# Altium PCB Sheet1.PcbDoc
Units mil, origin at the board's own origin, x right, y up, seen from the top; angles counter-clockwise.
Board outline 3622.05 x 2440.96 mil, 2 copper layers (Top Layer, Bottom Layer); 48 components, 73 nets, 261 pads, 32 vias.
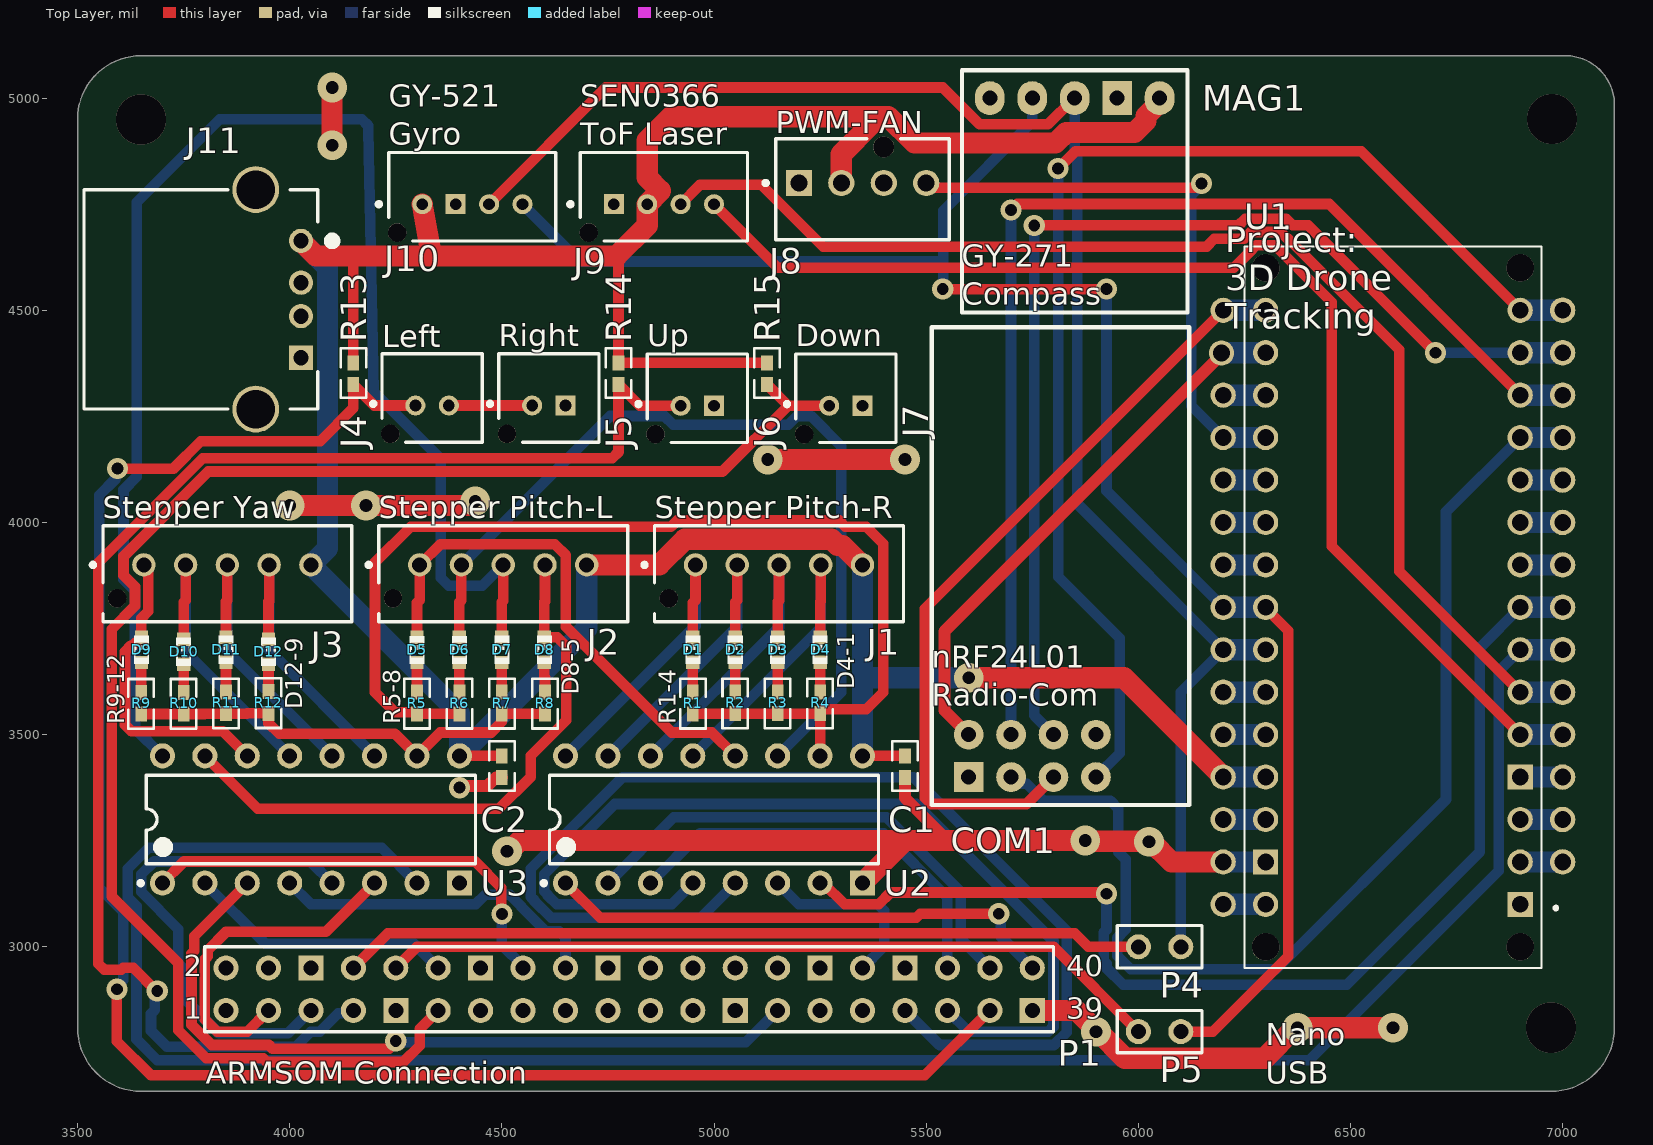
[diagram p0: Top Layer view]
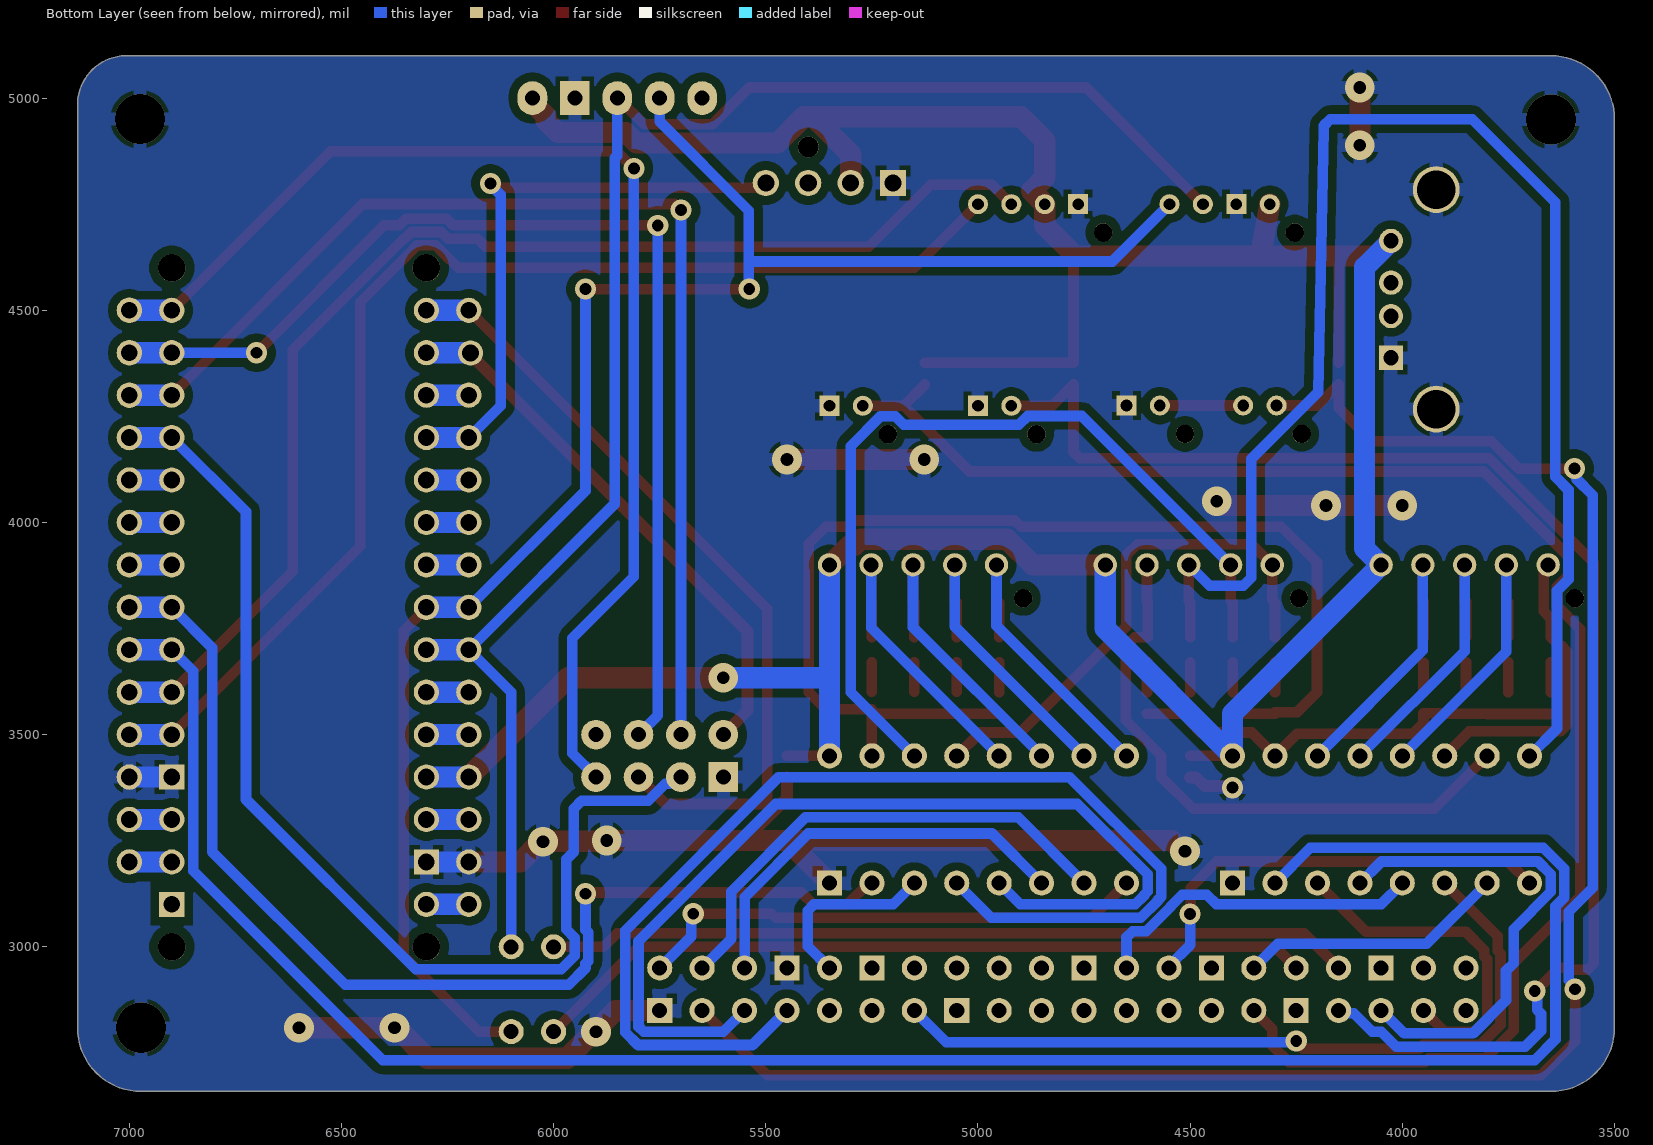
[diagram p1: Bottom Layer view, seen from below]
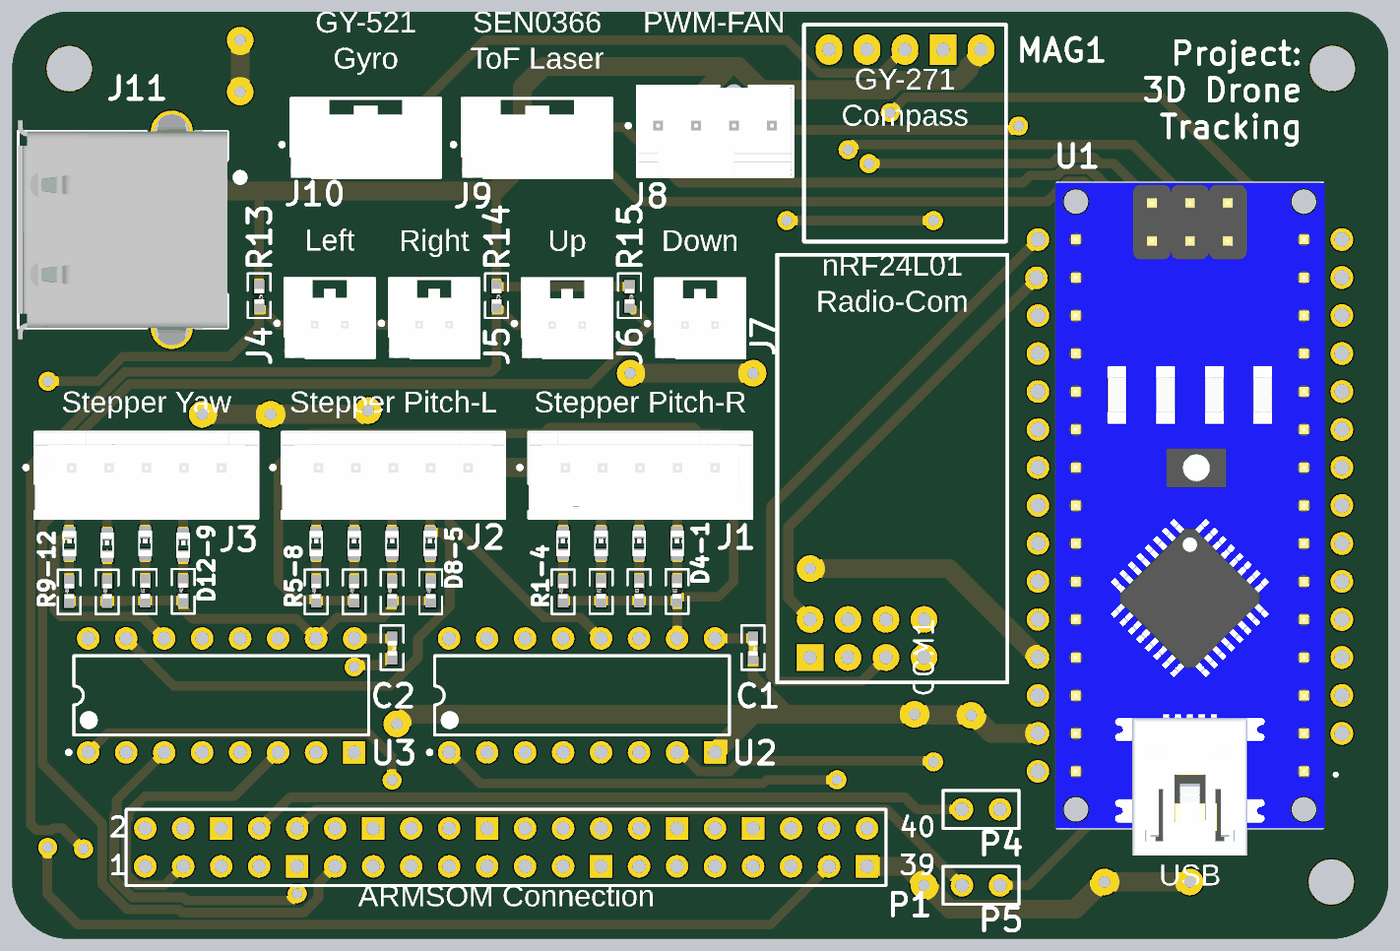
[diagram p2: 3D render of the assembled board from above, using the file's embedded part models]

## Layer stack, top to bottom
Top Solder: solder mask 0.4, Solder Resist, Dk 3.5
Top Layer: signal copper 1.4
Dielectric1: dielectric 12.6, FR-4, Dk 4.8
Bottom Layer: signal copper 1.4
Bottom Solder: solder mask 0.4, Solder Resist, Dk 3.5

## Board outline
3500,2809.05 3500,4950.17 3500,4950 cw(c3650,4950) 3650,5100 7000,5100 cw(c7005.82,4983.77) 7122.05,4989.59 7122.05,2809.05 cw(c6972.05,2809.06) 6972.05,2659.06 3650,2659.06 cw(c3650,2809.05)

## Design rules (kind name [scope] priority, off if disabled: settings)
Clearance "Text (Polygon)" [inPolygon vs isText] p1: gap=0 ignorepadtopadclearanceinfootprint=FALSE
Clearance "Masseflaeche (Polygon)" [All vs inPolygon] p2: gap=20 ignorepadtopadclearanceinfootprint=FALSE except(0: Arc-Hole Track-Hole SMDPad-Hole THPad-Hole Via-Hole Fill-Hole Poly-Hole Region-Hole Text-Hole)
Clearance "Abstand (Clearance)" [All] p3: gap=10 ignorepadtopadclearanceinfootprint=FALSE except(0: Arc-Hole Track-Hole SMDPad-Hole THPad-Hole Via-Hole Fill-Hole Poly-Hole Region-Hole Text-Hole; 6: SMDPad-SMDPad; 6.5: Arc-Arc Arc-Track Track-Track; 8: Arc-THPad Arc-Via Track-THPad Track-Via)
DiffPairsRouting [All] p1: maxlimit=15 minlimit=12 mostfreqgap=12 toplayer_minwidth=15 toplayer_maxwidth=15 toplayer_prefwidth=15 bottomlayer_minwidth=15 bottomlayer_maxwidth=15 bottomlayer_prefwidth=15 maxuncoupledlength=500
FabricationTestPointUsage TestPointUsage [All] p1: valid=0 allowmultiple=FALSE
FabricationTestpoint Testpoint [All] p1: side=3 testpointundercomponent=TRUE minsize=40 maxsize=100 preferedsize=60 minholesize=0 maxholesize=40 preferedholesize=32 testpointgrid=1 allowsidetop=TRUE allowsidebottom=TRUE usegrid=TRUE gridtolerance=0.01
HoleSize [All] p1: absolutevalues=TRUE maxlimit=250 minlimit=6 maxpercent=80.000 minpercent=20.000
HoleToHoleClearance [All] p1: gap=10 allowstackedmicrovias=FALSE
PlaneConnect [All] p1: planeconnectstyle=Relief reliefexpansion=20 reliefentries=4 reliefconductorwidth=32 reliefairgap=10
PolygonConnect [All] p1: connectstyle=Relief reliefconductorwidth=32 reliefentries=4 polygonreliefangle="90 Angle" airgapwidth=10
RoomDefinition Sheet1 [InComponentClass('Sheet1')] p1: confinementstyle=ConfineIn formatcopy=TRUE lockcomponents=FALSE outline 3500,2659.06 7122.05,2659.05 7122.05,5100 3500,5100
RoutingLayers RoutingLayers_1 [InNet('GND')] p1: top layer_v5=FALSE bottom layer_v5=FALSE
RoutingLayers [All] p2: top layer_v5=TRUE bottom layer_v5=TRUE
RoutingVias [All] p1: holewidth=28 width=50 viastyle="Through Hole" minholewidth=28 minwidth=50 maxholewidth=28 maxwidth=50
SMDEntry [All] p1: side=TRUE corner=TRUE anyangle=FALSE
SilkToSilkClearance [All] p1 off: silktosilkclearance=10
SilkToSolderMaskClearance SilkscreenOverComponentPads [IsPad] p1 off: minsilkscreentomaskgap=10 clearancetoexposedcopper=TRUE
SolderMaskExpansion [All] p1: expansion=4 istentingtop=FALSE
UnRoutedNet [All] p1: checkbadconnections=TRUE
Width Width_1 [InNet('5V')] p1: maxlimit=50 minlimit=25 preferedwidth=50 minimp=50.000000 maximp=50.000000 favimp=50.000000
Width [All] p2: maxlimit=200 minlimit=11 preferedwidth=25 minimp=50.000000 maximp=50.000000 favimp=50.000000
20 further rules are at their usual default settings.

## Classes and differential pairs
component class Sheet1: C1 C2 COM1 D1 D2 D3 D4 D5 D6 D7 D8 D9 D10 D11 D12 J1 J2 J3 J4 J5 J6 J7 J8 J9 J10 J11 MAG1 P1 P4 P5 R1 R2 R5 R6 R7 R8 R9 R11 R14 R15 U1 U2 U3

## Components (designator, comment, footprint, x,y, rotation, side; value= is the part's Value field where it differs from the comment)
C1 "100nF" C_SMD_C0402 5450,3449.4 r270 top
C2 "100nF" C_SMD_C0402 4500,3449.4 r270 top
COM1 "2.4 GHz radio module" nRF24L01 5900,3400 r90 top
D1 "SMD LED RED" SMD_0603_CHIP-LED 4950,3700 r0 top
D2 "SMD LED RED" SMD_0603_CHIP-LED 5050,3700 r0 top
D3 "SMD LED RED" SMD_0603_CHIP-LED 5150,3700 r0 top
D4 "SMD LED RED" SMD_0603_CHIP-LED 5250,3700 r0 top
D5 "SMD LED GREEN" SMD_0603_CHIP-LED 4300,3699.55 r0 top
D6 "SMD LED GREEN" SMD_0603_CHIP-LED 4400,3699.54 r0 top
D7 "SMD LED GREEN" SMD_0603_CHIP-LED 4500,3699.54 r0 top
D8 "SMD LED GREEN" SMD_0603_CHIP-LED 4600.02,3700 r0 top
D9 "SMD LED BLUE" SMD_0603_CHIP-LED 3650.6,3699.55 r0 top
D10 "SMD LED BLUE" SMD_0603_CHIP-LED 3750,3695.54 r0 top
D11 "SMD LED BLUE" SMD_0603_CHIP-LED 3850,3700 r0 top
D12 "SMD LED BLUE" SMD_0603_CHIP-LED 3950,3695.54 r0 top
J1 "Motor" FP-B5B-XH-AM_LF_SN-MFG 5153.15,3879.33 r180 top
J2 "Motor" FP-B5B-XH-AM_LF_SN-MFG 4503.15,3879.33 r180 top
J3 "Motor" FP-B5B-XH-AM_LF_SN-MFG 3853.15,3879.33 r180 top
J4 "B02B-PASK-1(LF)(SN)" FP-B02B-PASK-1_LF_SN-MFG#1 4335.63,4293.32 r180 top
J5 "B02B-PASK-1(LF)(SN)" FP-B02B-PASK-1_LF_SN-MFG#2 4610.63,4293.32 r180 top
J6 "B02B-PASK-1(LF)(SN)" FP-B02B-PASK-1_LF_SN-MFG#2 4960.63,4292.72 r180 top
J7 "B02B-PASK-1(LF)(SN)" FP-B02B-PASK-1_LF_SN-MFG#2 5310.63,4292.72 r180 top
J8 "47053-1000" FP-470531000-MFG 5350,4785.04 r180 top
J9 "B04B-PASK-1(LF)(SN)" FP-B04B-PASK-1_LF_SN-MFG#1 4881.89,4767.72 r180 top
J10 "B04B-PASK-1(LF)(SN)" FP-B04B-PASK-1_LF_SN-MFG#2 4430.51,4767.72 r180 top
J11 "292303-1" TE-292303-1_V 3981.65,4525.75 r270 top
MAG1 "GY-271" GY271 5850,5000 r270 top
P1 "Header 20X2" HDR2X20 3850,2850 r0 top
P4 "Header 2" HDR1X2 6100,3000 r180 top
P5 "Header 2" HDR1X2 6100,2800 r180 top
R1 "150" R_SMD_R0402 4950,3549.41 r90 top
R2 "150" R_SMD_R0402 5050,3550 r90 top
R3 "150" R_SMD_R0402 5150,3550 r90 top
R4 "150" R_SMD_R0402 5250,3550 r90 top
R5 "150" R_SMD_R0402 4300,3549.41 r90 top
R6 "150" R_SMD_R0402 4400,3549.41 r90 top
R7 "150" R_SMD_R0402 4500,3549.41 r90 top
R8 "150" R_SMD_R0402 4601.57,3549.41 r90 top
R9 "91" R_SMD_R0402 3650,3549.06 r90 top
R10 "91" R_SMD_R0402 3750,3549.06 r90 top
R11 "91" R_SMD_R0402 3850,3550 r90 top
R12 "91" R_SMD_R0402 3950,3550.59 r90 top
R13 "10K" R_SMD_R0402 4150,4375.59 r270 top value=10k
R14 "10K" R_SMD_R0402 4775,4375.59 r270 top value=10k
R15 "10K" R_SMD_R0402 5125,4375.59 r270 top value=10k
U1 "A000005" MODULE_A000005 6600,3800 r180 top
U2 "ULN2003AN" STM-DIP-16L 5000,3300 r90 top
U3 "ULN2003AN" STM-DIP-16L 4050,3300 r90 top

## Footprints (in the part's own frame and the unit in brackets; to place one, negate y for a bottom-side part, rotate by r counter-clockwise, add the part's x,y. Pads: shape width x height; smd on the part's side, far side on the other; paste and mask are expansions set on the pad)
C_SMD_C0402 [mm] "SMD, 0402"
  rect 0.9x0.7 smd: 1(-0.015,0) 2(1.285,0)
  silkscreen extent -0.89,-0.76 2.08,0.76, body extent 0.14,-0.3 1.14,0.3, height 0.2
FP-470531000-MFG [mm]
  rect 1.57x1.57 hole 1.02 paste-1000 mask+0: 1(3.81,-0.38)
  round 1.57 hole 1.02 paste-1000 mask+0: 2(1.27,-0.38) 3(-1.27,-0.38) 4(-3.81,-0.38)
  round 1.25 hole 1.25 unplated paste-1000 mask+0: ""(-1.27,-2.54)
  silkscreen extent -5.2,-3.02 5.92,3.02, body extent -5.3,-3.26 5.3,3.12, height 0.25
FP-B02B-PASK-1_LF_SN-MFG#1 [mm]
  round 1.2 hole 0.7 paste-1000 mask+0: 1(1,0.45) 2(-1,0.45)
  round 1.1 hole 1.1 unplated paste-1000 mask+0: ""(2.5,2.15)
  silkscreen extent -3,-2.65 3.65,2.65, body extent -3.1,-2.75 3.15,2.8, height 0.25
FP-B02B-PASK-1_LF_SN-MFG#2 [mm]
  round 1.2 hole 0.7 paste-1000 mask+0: 1(1,0.45)
  rect 1.2x1.2 hole 0.7 paste-1000 mask+0: 2(-1,0.45)
  round 1.1 hole 1.1 unplated paste-1000 mask+0: ""(2.5,2.15)
  silkscreen extent -3,-2.65 3.65,2.65, body extent -3.1,-2.75 3.15,2.8, height 0.25
FP-B04B-PASK-1_LF_SN-MFG#1 [mm]
  rect 1.2x1.2 hole 0.7 paste-1000 mask+0: 1(3,0.45)
  round 1.2 hole 0.7 paste-1000 mask+0: 2(1,0.45) 3(-1,0.45) 4(-3,0.45)
  round 1.1 hole 1.1 unplated paste-1000 mask+0: ""(4.5,2.15)
  silkscreen extent -5,-2.65 5.72,2.65, body extent -5.1,-2.75 5.15,2.8, height 0.25
FP-B04B-PASK-1_LF_SN-MFG#2 [mm]
  round 1.2 hole 0.7 paste-1000 mask+0: 1(3,0.45) 3(-1,0.45) 4(-3,0.45)
  rect 1.2x1.2 hole 0.7 paste-1000 mask+0: 2(1,0.45)
  round 1.1 hole 1.1 unplated paste-1000 mask+0: ""(4.5,2.15)
  silkscreen extent -5,-2.65 5.72,2.65, body extent -5.1,-2.75 5.15,2.8, height 0.25
FP-B5B-XH-AM_LF_SN-MFG [mm]
  round 1.4 hole 0.9 paste-1000 mask+0: 1(5,-0.525) 2(2.5,-0.525) 3(0,-0.525) 4(-2.5,-0.525) 5(-5,-0.525)
  round 1.1 hole 1.1 unplated paste-1000 mask+0: ""(6.6,1.475)
  silkscreen extent -7.45,-2.88 8.17,2.87, body extent -7.55,-2.98 7.55,2.98, height 0.25
GY271 [mil]
  oval 80x70 hole 35.43: DRDY(0,-200) SCL(0,0) SDA(0,-100) VCC(0,200)
  rect 80x70 hole 35.43: GND(0,100)
  silkscreen extent -66,-266 505,266
HDR1X2 [mm] "Connector; Header; 2 Position"
  round 1.5 hole 0.9: 1(0,0) 2(2.54,0)
  silkscreen extent -1.27,-1.27 3.81,1.27
HDR2X20 [mm] "Connector; Header; 20x2 Position"
  round 1.5 hole 0.9: 1(0,0) 2(0,2.54) 3(2.54,0) 4(2.54,2.54) 5(5.08,0) 7(7.62,0) 8(7.62,2.54) 10(10.16,2.54) 11(12.7,0) 12(12.7,2.54) 13(15.24,0) 15(17.78,0) 16(17.78,2.54) 17(20.32,0) 18(20.32,2.54) 19(22.86,0) 21(25.4,0) 22(25.4,2.54) 23(27.94,0) 24(27.94,2.54) 26(30.48,2.54) 27(33.02,0) 28(33.02,2.54) 29(35.56,0) 31(38.1,0) 32(38.1,2.54) 33(40.64,0) 35(43.18,0) 36(43.18,2.54) 37(45.72,0) 38(45.72,2.54) 40(48.26,2.54)
  rect 1.5x1.5 hole 0.9: 6(5.08,2.54) 9(10.16,0) 14(15.24,2.54) 20(22.86,2.54) 25(30.48,0) 30(35.56,2.54) 34(40.64,2.54) 39(48.26,0)
  silkscreen extent -1.27,-1.27 49.53,3.81
MODULE_A000005 [mm]
  rect 1.508x1.508 / inner round 1.508 / far side rect 1.508x1.508 hole 1: 1(-7.62,17.78)
  round 1.508 hole 1: 2(-7.62,15.24) 3(-7.62,12.7) 5(-7.62,7.62) 6(-7.62,5.08) 7(-7.62,2.54) 8(-7.62,0) 9(-7.62,-2.54) 10(-7.62,-5.08) 11(-7.62,-7.62) 12(-7.62,-10.16) 13(-7.62,-12.7) 14(-7.62,-15.24) 15(-7.62,-17.78) 16(7.62,-17.78) 17(7.62,-15.24) 18(7.62,-12.7) 19(7.62,-10.16) 20(7.62,-7.62) 21(7.62,-5.08) 22(7.62,-2.54) 23(7.62,0) 24(7.62,2.54) 25(7.62,5.08) 26(7.62,7.62) 27(7.62,10.16) 28(7.62,12.7) 30(7.62,17.78)
  rect 1.508x1.508 hole 1: 4(-7.62,10.16) 29(7.62,15.24)
  round 1.651 hole 1.651 unplated: ""(-7.62,20.32) ""(-7.62,-20.32) ""(7.62,20.32) ""(7.62,-20.32)
  silkscreen extent -9.85,-21.59 8.89,21.59, body extent -9,-21.6 9,23.4, height 12.6
nRF24L01 [mil]
  round 70 hole 35.43: CE(0,200) CSN(100,200) IRQ(100,0) MISO(0,0) MOSI(100,100) SCK(0,100) VCC(100,300)
  rect 70x70 hole 35.43: GND(0,300)
  silkscreen extent -66,-220 1060,387
R_SMD_R0402 [mm] "SMD, 0402"
  rect 0.9x0.7 smd: 1(-0.015,0) 2(1.285,0)
  silkscreen extent -0.89,-0.76 2.08,0.76, body extent 0.14,-0.3 1.14,0.3, height 0.2
SMD_0603_CHIP-LED [mm]
  rect 0.8x0.8 smd: A(0,-0.75) K(0,0.75)
  silkscreen extent -0.45,-0.85 0.45,0.85
STM-DIP-16L [mm] "DIP, 16-Leads, Body 19.7x7.1mm, Pitch 2.54mm"
  round 1.5 hole 0.9: 1(-3.81,8.89) 2(-3.81,6.35) 3(-3.81,3.81) 4(-3.81,1.27) 5(-3.81,-1.27) 6(-3.81,-3.81) 7(-3.81,-6.35) 9(3.81,-8.89) 10(3.81,-6.35) 11(3.81,-3.81) 12(3.81,-1.27) 13(3.81,1.27) 14(3.81,3.81) 15(3.81,6.35) 16(3.81,8.89)
  rect 1.5x1.5 hole 0.9: 8(-3.81,-8.89)
  silkscreen extent -3.93,-9.85 2.65,10.31, body extent -3.95,-9.85 3.95,9.85, height 5.33
TE-292303-1_V [mm] "THD, 4-Leads, Body 13.13x14mm, Pitch 2.5mm"
  round 1.45 hole 0.92: 1(-3.5,1.144) 2(-1,1.144) 3(1,1.144)
  rect 1.45x1.45 hole 0.92: 4(3.5,1.144)
  round 2.8 hole 2.3: 5(-6.57,-1.566) 6(6.57,-1.566)
  silkscreen extent -6.57,-11.85 6.56,3.25, body extent -8.12,-11.85 8.12,2.15, height 7.72

## Part data
C1 C2: library part C_SMD, "SMD Capacitor", Rated Voltage=25V, LatestRevisionDate=07-Sep-2019, Published=21-Feb-2011, Usage="only permitted for non-commercial purposes at HTL I Innsbruck"
COM1: library part nRF24L01, "Header, 4-Pin, Dual row", LatestRevisionDate=17-Jul-2002, LatestRevisionNote="Re-released for DXP Platform.", Publisher="Altium Limited"
D1 D2 D3 D4: library part SMD_LED_RED, "Red GaAs LED (Vf=2V, If=20mA)", LatestRevisionDate=21-Jun-2015, Published=29-Mar-2017, SimulationModellSource="Miscellaneous Devices", Usage="only permitted for non-commercial purposes at HTL I Innsbruck"
D5 D6 D7 D8: library part SMD_LED_GREEN, "Green GaAs LED (Vf=2V, If=20mA)", LatestRevisionDate=21-Jun-2015, Published=29-Mar-2017, SimulationModellSource="Miscellaneous Devices", Usage="only permitted for non-commercial purposes at HTL I Innsbruck"
D9 D10 D11 D12: library part SMD_LED_BLUE, "Blue SiC LED (Vf=3.2V, If=20mA)", LatestRevisionDate=21-Jun-2015, Published=29-Mar-2017, SimulationModellSource="Miscellaneous Devices", Usage="only permitted for non-commercial purposes at HTL I Innsbruck"
J1 J2 J3: library part CMP-17439-000304-1, "CONN HEADER VERT 5POS 2.5MM", Color=Green, Contact Resistance=20mR, Flammability Rating="UL94 V-0", Housing Color=White, Insulation Color=Natural, Max Current Rating=3A, Max Operating Temperature=85°C, Max Voltage Rating (AC)=250V, Min Operating Temperature=-25°C, Connector Type=Header, Contact Finish - Mating=TIN, Contact Material=Brass, Contact Plating=Copper, Contact Shape=Square, Contact Type="Male Pin", Depth=5.75mm, Fastening Type=Detent, Housing Material=Polyamide, Insulation Material=Nylon, Lead Free="Lead Free", Length=14.9mm, Mated Stacking Heights=9.8mm, Mount="Through Hole", Number of Positions=5, Number of Rows=1, Orientation=Straight, Packaging=Bulk, Pitch=2.5mm, Series=XH, Termination=Solder, Voltage Rating=250V
J4 J5 J6 J7: library part CMP-17439-000415-1, "CONN HEADER VERT 2POS 2MM", Color=Natural, Current Rating=3A, Flammability Rating="UL94 V-0", Housing Color=White, Insulation Resistance=1GR, Max Operating Temperature=85°C, Min Operating Temperature=-25°C, Voltage Rating=250V, Connector Type=Header, Contact Finish - Mating=TIN, Contact Material="Copper Alloy", Contact Mating Length=0.126inch, Contact Plating=Tin, Contact Shape=Square, Contact Type="Male Pin", Fastening Type=Ramp, Gender=Male, Insulation Color=Natural, Insulation Material=PBT, Lead Free="Lead Free", Mated Stacking Heights=14.9mm, Material=Polybutylene, Mount="Through Hole", Number of Contacts=2, Number of Positions=2, Number of Rows=1, Orientation=Straight, Packaging=Bulk, Pitch=2mm, Series=PA, Termination=Solder
J8: library part CMP-04776-000290-2, "CONN HEADER VERT 4POS 2.54MM", Ambient Temperature Range High=105°C, Current Rating=500mA, Housing Color=Beige, Manufacturer Lifecycle Status=ACTIVE, Max Operating Temperature=75°C, Min Operating Temperature=0°C, Voltage Rating=250V, Contact Material="Brass, Copper", Contact Plating=Tin, Country of Origin=HK, Depth=5.84mm, Gender=Male, Glow Wire Compliant=Non-compliant, Halogen Free="Low Halogen", Height=7.7mm, Housing Material=Nylon, Lead Pitch=2.54mm, Length=10.2mm, Lifecycle Status=Production, Mount="Through Hole", NexarPartId=854935, Number of Circuits=4, Number of Contacts=4, Number of Pins=4, Number of Positions=4, Number of Rows=1, Orientation=Vertical, Packaging=Bulk, Pitch=2.54mm, Plating=Copper, Radiation Hardening=No, REACH SVHC=Unknown, RoHS=Compliant, Schedule B="8536694040, 8536694040", Termination="Through Hole", Voltage Rating (DC)=250V
J9 J10: library part CMP-17439-000192-1, "CONN HEADER VERT 4POS 2MM", Color=Natural, Contact Resistance=20mR, Current Rating=3A, Flammability Rating="UL94 V-0", Housing Color=White, Max Operating Temperature=85°C, Max Voltage Rating (AC)=250V, Min Operating Temperature=-25°C, Connector Type=Header, Contact Finish - Mating=TIN, Contact Material="Copper Alloy", Contact Mating Length=0.126inch, Contact Plating=Copper, Contact Shape=Square, Contact Type="Male Pin", Depth=5.3mm, Fastening Type=Ramp, Gender=Male, Insulation Color=Natural, Insulation Material=PBT, Lead Free="Lead Free", Length=10mm, Mated Stacking Heights=14.9mm, Max Current Rating=3A, Mount="Through Hole", Number of Contacts=4, Number of Positions=4, Number of Rows=1, Orientation=Straight, Packaging=Bulk, Pitch=2mm, Series=PA, Termination=Solder, Voltage Rating=250V
J11: library part CMP-2000-05404-1, "1 Port Right Angle Through Hole Mount Female Type A USB Connector, 4 Position, -55 to 85 degC, RoHS, Tube", Manufacturer="TE Connectivity", Package Description="4-Pin Through Hole Device, Body 14 x 13.13 mm, Pitch 2.5 mm", Connector Mounting=PCB, Connector Type=USBA, Contact Material=Copper, Contact Plating=Gold, Contact Termination Type=Solder, Datasheet URL=http://www.farnell.com/cad/1653030.pdf, Datasheet Version=Feb-12, Gender=Receptacle, Manufacturer URL=http://www.te.com/, No. of Contacts=4, Package Reference=292303-1, SVHC=NoSVHC(16-Jun-2014)
MAG1: library part GY271, "I2C Compass Module Compass Magnet Sensor"
P1: "Header, 20-Pin, Dual row", LatestRevisionDate=17-Jul-2002, LatestRevisionNote="Re-released for DXP Platform.", Publisher="Altium Limited"
P4 P5: "Header, 2-Pin", LatestRevisionDate=17-Jul-2002, LatestRevisionNote="Re-released for DXP Platform.", Publisher="Altium Limited"
R1 R2 R3 R4 R5 R6 R7 R8 R9 R10 R11 R12 R13 R14 R15: library part R_SMD, "SMD Resistor", LatestRevisionDate=07-Sep-2019, Published=21-Feb-2011, Usage="only permitted for non-commercial purposes at HTL I Innsbruck"
U1: "Small, complete, and breadboard-friendly board based on the ATmega328 (Arduino Nano 3.x).", Package="Non-Standard Arduino", Availability="In Stock", Check_prices=https://www.snapeda.com/parts/A000005/Arduino/view-part/?ref=eda, MF=Arduino, MP=A000005, Price=None, Purchase-URL=https://pricing.snapeda.com/search/part/A000005/?ref=eda, SnapEDA_Link=https://www.snapeda.com/parts/A000005/Arduino/view-part/?ref=snap
U2 U3: library part CMP-2000-07351-1, "Seven Darlington Array, 50 V, 0.5 A, -40 to 85 degC, 16-Pin DIP, RoHS, Tube", Collector Emitter Voltage V(br)ceo=50V, DC Collector Current=500mA, DC Current Gain hFE=1000hFE, Manufacturer=STMicroelectronics, Operating Temperature Max=85°C, Output Current=0.5A, Package Description="16-Pin DIP, Body 19.7 x 7.1 mm, Pitch 2.54 mm", Package Reference=DIP-16L, PartNumber=ULN2003A, Power Dissipation Pd=-, Transistor Case Style=DIP, Automotive Qualification Standard=-, Datasheet URL=http://www2.st.com/content/ccc/resource/technical/document/datasheet/f3/6e/c8/64/4d/b3/4e/38/CD00001244.pdf/files/CD00001244.pdf/jcr:content/translations/en.CD00001244.pdf, Datasheet Version="Rev. 8, 06/2012", Manufacturer URL=http://www.st.com/, Mounting Technology=ThroughHole, MSL=MSL2-1year, No. of Pins=16Pins, Product Range=-, SVHC=NoSVHC(17-Dec-2015), Transistor Polarity=NPN, VOUT=50V

## Free pads (board coordinates)
  oval 59.37x60 hole 39.37: 32(7000,4500) 33(7000,4400) 34(7000,4300) 35(7000,4200) 36(7000,3800) 37(7000,3700) 38(7000,3600) 39(7000,3500) 40(7000,3400) 47(7000,3300) 48(7000,3200) 49(7000,3900) 50(7000,4000) 51(7000,4100)
  round 59.37 hole 39.37: 41(6200,3200) 42(6200,3400) 43(6200,3700) 44(6200,3800) 45(6200,4200) 46(6200,4500) 52(6200,4300) 53(6200,4100) 55(6200,4000) 56(6200,3900) 57(6200,3500) 58(6200,3600) 59(6200,3300) 60(6200,3100) 61(6195.95,4399.19)

## Via types
v1: diameter 50, hole 28, Top Layer to Bottom Layer, 15 vias
v2: diameter 70, hole 30, Top Layer to Bottom Layer, 14 vias
v3: diameter 118.11, hole 118.11, Top Layer to Bottom Layer, 3 vias

## Nets (pads, with @x,y where several pads share a name; then routed paths per layer and width w, separated by ;. In a path a pad name is that pad's centre, name@x,y a point inside that pad or via, vN(x,y) a via of type N, cw(c..) or ccw(c..) an arc to the next point about the centre after c; other vN are vias at no path point)
3.3V: COM1.VCC pad.61 U1.17 | length 1295.7
  Top Layer w28: COM1.VCC 5543,3557 5543,3743 pad.61@6200,4400
  Bottom Layer w50: pad.61@6200,4400 U1.17
5V: C1.1 C2.1 J1.5 J2.5 J3.5 J8.2 J9.2 J10.1 J11.1 MAG1.VCC pad.42 R13.1 R14.1 R15.1 U1.27 U2.9 U3.9 | length 7925.9
  Top Layer w25: R13.1 4150,4628 ; U3.9 C2.1 ; 4770.52,4628 4775,4623.52 R14.1 R15.1 ; U2.9 C1.1
  Top Layer w50: J11.1 4062.24,4628 4150,4628 4334.4,4628 ; J10.1 4334.4,4628 ; J2.5 4870.66,3900 4931.22,3960.56 5276.66,3960.56 5291.22,3946 5302.61,3946 5348.61,3900 J1.5 ; J8.2 5300,4867.65 5375,4942.65 ; v2(5600,3634) 5966,3634 pad.42 ; MAG1.VCC 6050,4989.59 6018,4957.59 6018,4946.33 5990.67,4919 5830.02,4919 5805.02,4894 5472.51,4894 5410.51,4956 4898.52,4956 4842.52,4900 4842.52,4812.96 4874,4781.48 J9.2 4842.52,4700 4770.52,4628 4334.4,4628
  Bottom Layer w50: J11.1 4089,4601.24 4089,3939 J3.5 4400,3550 U3.9 4700,3750 J2.5 ; U2.9 5350,3630.51 ; J1.5 5350,3630.51 ; v2(5600,3634) 5353.49,3634 5350,3630.51 ; pad.42 U1.27
A1: pad.53 U1.20 | length 100
  Bottom Layer w50: pad.53 U1.20
A2: pad.55 U1.21 | length 100
  Bottom Layer w50: pad.55 U1.21
A3: pad.56 U1.22 | length 100
  Bottom Layer w50: pad.56 U1.22
A6: pad.58 U1.25 | length 100
  Bottom Layer w50: pad.58 U1.25
A7: pad.57 U1.26 | length 100
  Bottom Layer w50: pad.57 U1.26
AREF: pad.52 U1.18 | length 100
  Bottom Layer w50: pad.52 U1.18
D0: U1.1
D1: pad.48 U1.2 | length 100
  Bottom Layer w50: U1.2 pad.48
D6: pad.49 U1.9 | length 100
  Bottom Layer w50: U1.9 pad.49
D8: pad.51 U1.11 | length 100
  Bottom Layer w50: U1.11 pad.51
D9: pad.50 U1.10 | length 100
  Bottom Layer w50: U1.10 pad.50
FAN_PWM: J8.4 pad.45 U1.19 | length 1398
  Top Layer w25: J8.4 5511.34,4788.66 6138.66,4788.66 v1(6149,4799)
  Bottom Layer w25: v1(6149,4799) 6149,4795.86 6125,4771.86 6125,4275 pad.45
  Bottom Layer w50: pad.45 U1.19
GND: C1.2 C2.2 COM1.GND J5.2 J6.2 J7.2 J8.1 J9.1 J10.2 J11.4 J11.5 J11.6 MAG1.GND P1.34 P1.39 pad.40 pad.41 U1.4 U1.29 U2.8 U3.8 | length 4190.4
  Top Layer w28: v1(4400,3375) 4404.21,3379.21 4466.16,3379.21 4485.77,3398.82 C2.2 ; C1.2 5450,3351.14 5550.83,3250.32
  Top Layer w50: v2(4000,4040) v2(4180,4040) 4421.63,4040 4431.63,4050 v2(4437.05,4050) ; v2(4100,4888.8) v2(4100,5025) ; v2(4512.2,3225) 4517.62,3225 4542.93,3250.32 5450.31,3250.32 ; v2(5126.74,4148.26) v2(5450,4148.26) ; U2.8 5450.31,3250.32 ; P1.39 5854.06,2850 5900,2804.06 v2(5900,2800) 5905.41,2800 5967.94,2737.47 6298.01,2737.47 6369.59,2809.05 v2(6375,2809.05) v2(6600,2809.05) ; pad.41 6077.82,3200 6030.41,3247.41 v2(6025,3247.41) 6023.55,3248.86 5876.45,3248.86 v2(5875,3250.32) 5550.83,3250.32 5450.31,3250.32
  Bottom Layer w50: pad.41 U1.29 ; U1.4 pad.40
  other v3: 6972.05,2809.05 3650,4950 6975,4950.38
LED1: pad.37 U1.7 U3.7 | length 5204
  Bottom Layer w25: U3.7 4217,3233 3667.7,3233 3618.47,3183.77 3618.47,3116.23 3638.89,3095.82 3638.89,2781.91 3688.02,2732.78 6402.78,2732.78 6849,3179 6849,3649 U1.7
  Bottom Layer w50: U1.7 pad.37
LED2: pad.36 U1.8 U2.7 | length 2630.6
  Top Layer w25: U2.7 5257.79,3150 5307.82,3099.97 5388.02,3099.97 5416.05,3128 5922,3128 v1(5925,3125)
  Bottom Layer w25: v1(5925,3125) 5925,3040.3 5918.47,3033.77 5918.47,2966.23 5925,2959.7 5925,2950 5964.53,2910.47 6491.47,2910.47 6805,3224 6805,3705 U1.8
  Bottom Layer w50: U1.8 pad.36
LO: R7.1 R8.1 R9.1 R10.1 R11.1 R12.1 U3.10 | length 1059.1
  Top Layer w25: R9.1 R10.1 3799,3548.47 3799.94,3549.41 R11.1 3899,3549.41 3899.59,3550 R12.1 3950,3527 3975,3502 4248,3502 U3.10 4355,3505 4475,3505 4500,3530 R7.1 R8.1
NetD1_A: D1.A R1.2 | length 70.5
  Top Layer w25: R1.2 D1.A
NetD1_K: D1.K J1.1 U2.16 | length 750
  Top Layer w25: D1.K 4950,3811 4956.3,3817.3 J1.1
  Bottom Layer w25: U2.16 4956.3,3756.3 J1.1
NetD2_A: D2.A R2.2 | length 69.9
  Top Layer w25: R2.2 D2.A
NetD2_K: D2.K J1.2 U2.15 | length 748.6
  Top Layer w25: D2.K 5050,3812 5054.72,3816.72 J1.2
  Bottom Layer w25: U2.15 5054.72,3754.72 J1.2
NetD3_A: D3.A R3.2 | length 69.9
  Top Layer w25: R3.2 D3.A
NetD3_K: D3.K J1.3 U2.14 | length 747.3
  Top Layer w25: D3.K 5150,3813 5153.15,3816.15 J1.3
  Bottom Layer w25: U2.14 5153.15,3753.15 J1.3
NetD4_A: D4.A R4.2 | length 69.9
  Top Layer w25: R4.2 D4.A
NetD4_K: D4.K J1.4 U2.13 | length 746
  Top Layer w25: D4.K 5250,3813 5251.57,3814.57 J1.4
  Bottom Layer w25: U2.13 5251.57,3751.57 J1.4
NetD5_A: D5.A R5.2 | length 70
  Top Layer w25: R5.2 D5.A
NetD5_K: D5.K J2.1 U2.12 | length 1243.2
  Top Layer w25: D5.K 4300,3811 4306.3,3817.3 J2.1 4355.3,3949 4625,3949 4651,3923 4651,3754 4900,3505 4995,3505 U2.12
NetD6_A: D6.A R6.2 | length 70
  Top Layer w25: R6.2 D6.A
NetD6_K: D6.K J2.2 U2.11 | length 2051.8
  Top Layer w25: D6.K 4400,3812 4404.72,3816.72 J2.2
  Bottom Layer w25: J2.2 4755.72,4251 4882.86,4251 4903.86,4230 5174.52,4230 5194.74,4250.22 5229.67,4250.22 5300,4179.89 5300,3600 U2.11
NetD7_A: D7.A R7.2 | length 70
  Top Layer w25: R7.2 D7.A
NetD7_K: D7.K J2.3 U3.16 | length 3465.6
  Top Layer w25: D7.K 4500,3812 4503.15,3815.15 J2.3
  Bottom Layer w25: U3.16 3635.46,3514.54 3635.46,3838.72 3608.24,3865.94 3608.24,4076.64 3639.75,4108.15 3639.75,4754.29 3835.46,4950 4169.77,4950 4184.41,4935.36 4184.93,4925.53 4198,4307.5 4356,4149.5 4356,3870 4375,3851 4454.15,3851 J2.3
NetD8_A: D8.A R8.2 | length 71.1
  Top Layer w25: D8.A 4600.02,3635.56 4601.57,3634 R8.2
NetD8_K: D8.K J2.4 U3.15 | length 1425.7
  Top Layer w25: U3.15 3925,3325 4493,3325 4568,3400 4568,3450 4652,3534 4652,3708 4630.47,3729.53 D8.K 4600.02,3813 4601.57,3814.56 J2.4
NetD9_A: D9.A R9.2 | length 70.8
  Top Layer w25: R9.2 D9.A@3650,3670.47
NetD9_K: D9.K J3.1 U3.14 | length 725
  Top Layer w25: J3.1 3666.96,3889.34 3666.96,3790.75 3650,3773.79 3650,3729.53 3629.19,3708.72 3624.93,3708.72 3611.75,3695.54 3611.75,3523.4 3627.16,3508 3842,3508 U3.14
NetD10_A: D10.A R10.2 | length 70.8
  Top Layer w25: R10.2 D10.A@3750,3670.47
NetD10_K: D10.K J3.2 U3.13 | length 724
  Top Layer w25: D10.K@3750,3729.53 3750,3812 3754.72,3816.72 J3.2
  Bottom Layer w25: J3.2 3754.72,3695.28 U3.13
NetD11_A: D11.A R11.2 | length 69.9
  Top Layer w25: R11.2 D11.A
NetD11_K: D11.K J3.3 U3.12 | length 724
  Top Layer w25: D11.K 3850,3813 3853.15,3816.15 J3.3
  Bottom Layer w25: J3.3 3853.15,3696.85 U3.12
NetD12_A: D12.A R12.2 | length 68.3
  Top Layer w25: R12.2 D12.A@3950,3669.53
NetD12_K: D12.K J3.4 U3.11 | length 725
  Top Layer w25: D12.K@3950,3728.59 3950,3813 3951.57,3814.57 J3.4
  Bottom Layer w25: J3.4 3951.57,3698.43 U3.11
NetJ4_2: J4.2 J5.1 | length 196.3
  Top Layer w25: J4.2 J5.1
NetP1_8: P1.8 P4.2 | length 1896.8
  Top Layer w25: P1.8 4231.53,3031.53 5850,3031.53 5881.53,3000 P4.2
NetP1_10: P1.10 P5.2 | length 1853.6
  Top Layer w25: P1.10 4300.03,3000.03 5799.97,3000.03 P5.2
NetR1_1: R1.1 R2.1 R3.1 R4.1 R5.1 R6.1 U2.10 | length 2715.9
  Top Layer w25: R6.1 R5.1 4300,3553 4248,3553 4201,3600 4201,3906 4285,3990 4898.43,3990 4912.99,4004.56 5294.88,4004.56 5309.44,3990 5359,3990 5399,3950 5399,3600 5359,3560 5250,3560 R4.1 ; R1.1 4999,3548.82 4999.59,3549.41 R2.1 R3.1 R4.1 ; U2.10 R4.1
RST_1: pad.47 U1.3 | length 100
  Bottom Layer w50: U1.3 pad.47
RST_2: pad.59 U1.28 | length 100
  Bottom Layer w50: pad.59 U1.28
S1_IN1: P1.40 U2.1 | length 1219.3
  Top Layer w25: U2.1 4731.53,3068.47 5476.79,3068.47 5486.27,3077.95 v1(5670.9,3077.95)
  Bottom Layer w25: v1(5670.9,3077.95) 5675.68,3073.17 5675.68,3024.32 P1.40
S1_IN2: P1.38 U2.2 | length 1176.6
  Bottom Layer w25: U2.2 4905,3305 5406.55,3305 5581.5,3130.05 5581.5,3018.5 P1.38
S1_IN3: P1.36 U2.3 | length 977.6
  Bottom Layer w25: U2.3 4967,3267 5400,3267 5550,3117 P1.36
S1_IN4: P1.35 U2.4 | length 2303.9
  Bottom Layer w25: U2.4 4899.97,3099.97 4661.45,3099.97 4629.28,3099.97 4608.5,3120.75 4608.5,3121.97 4599.97,3130.5 4599.97,3170.72 4765.75,3336.5 5476.7,3336.5 5800.03,3013.17 5800.03,2811.98 5788.02,2799.97 5600.03,2799.97 P1.35
S2_IN1: P1.33 U2.5 | length 2771.8
  Bottom Layer w25: U2.5 4968.47,3068.47 4648.4,3068.47 4616.23,3068.47 4577,3107.7 4577,3108.92 4568.47,3117.45 4568.47,3183.77 4784.2,3399.5 5470.09,3399.5 5831.53,3038.06 5831.53,2798.93 5801.07,2768.47 5531.53,2768.47 P1.33
S2_IN2: P1.32 U2.6 | length 434.2
  Bottom Layer w25: U2.6 5200.03,3099.97 5386.36,3099.97 5401,3085.33 5401,3001 P1.32
S2_IN3: P1.16 U3.1 | length 1065.2
  Top Layer w25: U3.1 3751,3201 4437.05,3201 4498.52,3139.53 4498.52,3078.51 v1(4500,3077.03) ; P1.16@4543.48,2956.52 P1.16
  Bottom Layer w25: v1(4500,3077.03) 4500,3004.36 4550,2954.36 P1.16
S2_IN4: P1.12 U3.2 | length 632.8
  Bottom Layer w25: U3.2 3943,3007 4293,3007 P1.12
S3_IN1: P1.27 U3.3 | length 1835
  Top Layer w25: U3.3 3775,3025 3775,2990.3 3768.47,2983.77 3768.47,2816.23 3816.23,2768.47 3951.08,2768.47 3959.55,2760 4235,2760 4250,2775 v1(4250,2778.28)
  Bottom Layer w25: v1(4250,2778.28) 4253.28,2775 5075,2775 P1.27
S3_IN2: P1.18 U3.4 | length 794.6
  Bottom Layer w25: U3.4 4050.03,3099.97 4438.02,3099.97 4460.57,3122.53 4518.85,3122.53 4545.5,3095.87 4545.5,3094.65 4603.18,3036.97 4635.36,3036.97 4650,3022.33 P1.18
S3_IN3: P1.5 U3.5 | length 1173.6
  Bottom Layer w25: P1.5 3995.78,2795.78 3833.47,2795.78 3755.61,2873.64 3755.61,2943.26 3737.66,2961.22 3737.66,3041.6 3649.97,3129.28 3649.97,3170.72 3680.25,3201 4049,3201 U3.5
S3_IN4: P1.3 U3.6 | length 807
  Top Layer w25: P1.3 3899.97,2799.97 3829.28,2799.97 3799.97,2829.28 3799.97,2970.72 3806.5,2977.25 3806.5,2991.5 3850,3035 4085,3035 U3.6
SCL: J10.3 MAG1.SCL P4.1 pad.43 U1.24 | length 3842.1
  Top Layer w25: J10.3 4744.88,5025 5539,5025 5626,4938 5786.79,4938 5848.79,5000 MAG1.SCL
  Bottom Layer w25: MAG1.SCL 5850,4864.47 5856.47,4858 5856.47,4043.53 pad.43 6100,3600 P4.1
  Bottom Layer w50: pad.43 U1.24
SDA: J10.4 MAG1.SDA P5.1 pad.44 U1.23 | length 4119.3
  Top Layer w25: v1(5539,4550) v1(5925,4550) ; P5.1 6174.95,2800 6353,2978.05 6353,3745 U1.23@6298,3800
  Bottom Layer w25: J10.4 4683.62,4615 5540,4615 ; v1(5539,4550) 5540,4551 5540,4615 ; MAG1.SDA@5750,5013.18 MAG1.SDA 5750,4945 5540,4735 5540,4615 ; v1(5925,4550) 5925,4075 pad.44
  Bottom Layer w50: pad.44 U1.23
SPI_CE: COM1.CE pad.35 U1.12 | length 2625.5
  Bottom Layer w25: COM1.CE 5712.18,3400 5727.69,3384.49 5737.02,3384.49 5777.01,3344.5 5934.2,3344.5 5953,3325.7 5953,3223.35 5970.5,3205.85 5970.5,3041.25 5949.97,3020.72 5949.97,2979.28 5982.25,2947 6325,2947 6725,3347 6725,4025 U1.12
  Bottom Layer w50: U1.12 pad.35
SPI_CSN: COM1.CSN pad.34 U1.13 | length 2728.8
  Top Layer w25: v1(5700,4736.35) 5714.15,4750.5 6449.5,4750.5 U1.13
  Bottom Layer w25: COM1.CSN v1(5700,4736.35)
  Bottom Layer w50: U1.13 pad.34
SPI_MISO: COM1.MISO pad.32 U1.15 | length 2878.7
  Top Layer w25: v1(5810.97,4834.16) 5851.81,4875 6525,4875 U1.15
  Bottom Layer w25: v1(5810.97,4834.16) 5810.97,3872.03 5956,3727 5956,3456 COM1.MISO
  Bottom Layer w50: U1.15 pad.32
SPI_MOSI: COM1.MOSI pad.33 U1.14 | length 2601.5
  Top Layer w25: v1(5754.78,4700) 6235.95,4700 6251.95,4716 6348.05,4716 6364.05,4700 6400,4700 v1(6700,4400)
  Bottom Layer w25: v1(5754.78,4700) 5754.78,3545.22 COM1.MOSI ; v1(6700,4400) U1.14
  Bottom Layer w50: U1.14 pad.33
SPI_SCK: COM1.SCK pad.46 U1.16 | length 1875.4
  Top Layer w25: COM1.SCK 5736.5,3336.5 5511.64,3336.5 5497,3351.14 5497,3797 pad.46
  Bottom Layer w50: pad.46 U1.16
SW_D: J7.1 P1.11 R15.2 | length 3813.9
  Top Layer w25: P1.11 4306.17,2806.17 4306.17,2766.82 4267.85,2728.5 3946.5,2728.5 3938.03,2736.97 3803.18,2736.97 3736.97,2803.18 3736.97,2961.9 3580.25,3118.62 3580.25,3748.59 3635.46,3803.8 3635.46,3848.24 3608.24,3875.46 3608.24,3919.91 3808.33,4120 5020,4120 5175,4275 ; R15.2 5175,4275 ; J7.1 5175,4275
SW_RL: J4.1 P1.37 R13.2 | length 4388
  Top Layer w25: v1(3593.31,2900) 3592.29,2898.98 3592.29,2777.71 3673,2697 5497,2697 P1.37 ; v1(3594.25,4127) 3726.24,4127 3790.71,4191.47 4071.69,4191.47 4150,4269.78 R13.2 4199.39,4275.61 J4.1
  Bottom Layer w25: v1(3593.31,2900) 3593.31,2906.76 3607.39,2920.84 3607.39,3082.77 3551.15,3139 3551.15,4064.1 3589.47,4102.42 3589.47,4122.22 v1(3594.25,4127)
SW_U: J6.1 P1.7 R14.2 | length 3403.1
  Top Layer w25: v1(3687.93,2895.93) 3685.74,2895.93 3631.29,2950.38 3608.18,2950.38 3603.3,2945.5 3563.4,2945.5 3548.75,2960.14 3548.75,3904.97 3795.28,4151.5 4760.36,4151.5 4775,4166.14 R14.2 4825,4275 J6.1
  Bottom Layer w25: v1(3687.93,2895.93) 3681.79,2889.8 3681.79,2851.18 3673,2842.39 3673,2802 3710.72,2764.28 4014.31,2764.28 4050,2799.97 4070.72,2799.97 4114.23,2843.48 4143.48,2843.48 P1.7
ToF_RX: J9.3 pad.38 U1.6 | length 2927
  Top Layer w25: J9.3 4966.88,4795.62 5111.45,4795.62 5257.08,4650 6160.76,4650 6179.26,4668.5 6249,4668.5 6265,4684.5 6335,4684.5 6351,4668.5 6353.12,4668.5 6614.81,4406.81 6614.81,3885.19 U1.6
  Bottom Layer w50: U1.6 pad.38
ToF_TX: J9.4 pad.39 U1.5 | length 2898.5
  Top Layer w25: J9.4 5150,4600 6225.05,4600 6262.05,4637 6278.05,4653 6321.95,4653 6337.95,4637 6456,4518.95 6456,3944 U1.5
  Bottom Layer w50: U1.5 pad.39
VIN: pad.60 U1.30 | length 100
  Bottom Layer w50: pad.60 U1.30
pads on no net: COM1.IRQ J1. J2. J3. J4. J5. J6. J7. J8. J8.3 J9. J10. J11.2 J11.3 MAG1.DRDY P1.1 P1.2 P1.4 P1.6 P1.9 P1.13 P1.14 P1.15 P1.17 P1.19 P1.20 P1.21 P1.22 P1.23 P1.24 P1.25 P1.26 P1.28 P1.29 P1.30 P1.31 U1.

## Polygon pours and split planes (outlines as drawn)
GND on Bottom Layer "GND_L02_P001" (solid, remove dead copper, pour order 1): 3500,2809.05 3500,4950.17 3500,4950 cw(c3650,4950) 3650,5100 7000,5100 cw(c7005.82,4983.77) 7122.05,4989.59 7122.05,2809.05 cw(c6972.05,2809.06) 6972.05,2659.06 3650,2659.06 cw(c3650,2809.05)

## Other copper
Top Layer:
  text "LAYOUT TOP" at 10300,880 h70
  text "2" at 10300,280 h70
Bottom Layer:
  text "LAYOUT BOTTOM" at 10300,880 h70
  text "3" at 10300,280 h70

## Silkscreen, mask and mechanical layers (free items; w line width, h text height)
Top Overlay:
  text "PWM-FAN" at 5145.28,4900 h90
  text "GY-521 / Gyro" at 4233.66,4872.05 h90
  text "SEN0366 / ToF Laser" at 4685.04,4872.05 h90
  text "GY-271 / Compass" at 5584.25,4494.88 h90
  text "Project:  / 3D Drone / Tracking" at 6205.22,4456.8 h60
  text "Right" at 4492.52,4397.66 h90
  text "Up" at 4842.52,4397.05 h90
  text "Down" at 5192.52,4397.05 h90
  text "Left" at 4217.52,4395.66 h90
  text "Stepper Yaw" at 3559.84,3992.52 h90
  text "Stepper Pitch-L" at 4209.84,3992.52 h90
  text "Stepper Pitch-R" at 4859.84,3992.52 h90
  text "D4-1" at 5329.99,3606.71 h40 r90
  text "D8-5" at 4681.56,3593.38 h40 r90
  text "D12-9" at 4029.99,3560.06 h40 r90
  text "nRF24L01 / Radio-Com" at 5513.39,3550 h90
  text "R9-12" at 3610,3524.06 h40 r90
  text "R5-8" at 4260,3524.41 h40 r90
  text "R1-4" at 4910,3524.41 h40 r90
  text "ARMSOM Connection" at 3801.57,2660 h90
  text "Nano  / USB" at 6300,2660 h90
  text "BESTUECK. TOP" at 10300,880 h70
  text "4" at 10300,280 h70
Bottom Overlay:
  text "BESTUECK. BOTTOM" at 10300,880 h70
  text "5" at 10300,280 h70
Mechanical 1 (Frontplatte):
  the board outline again, w0
Mechanical 4 (Printumriss):
  lines w10: 3500,4950 cw(c3650,4950) 3650,5100 7000,5100 cw(c7005.82,4983.77) 7122.05,4989.59 7122.05,2809.05 cw(c6972.05,2809.06) 6972.05,2659.06 3650,2659.06 cw(c3650,2809.06) 3500,2809.05 3500,4950.17
Mechanical 16 (Blatt-Beschriftung):
  drawing of 350 lines, arcs and shapes, not listed
  text "1" at 1427,7465 h70
  text "2" at 4287,7465 h70
  text "3" at 7167,7465 h70
  text "4" at 10037,7465 h70
  text "A" at 75,6559 h70
  text "A" at 11375,6559 h70
  text "B" at 75,4667 h70
  text "B" at 11375,4667 h70
  text "C" at 75,2757 h70
  text "C" at 7400,2600 h70
  text "TITEL:" at 6850,1300 h45
  text "3D DRONE TRACKING" at 6900,1180 h70
  text "NAME:" at 6850,1000 h45
  text "GRUPPE:" at 8350,1000 h45
  text "KLASSE:" at 9180,1000 h45
  text "DOKUMENTENART:" at 10250,1000 h45
  text "LUKAS KRAHBICHLER" at 6900,880 h70
  text "I" at 8400,880 h70
  text "5CHEL" at 9230,880 h70
  text "D" at 75,867 h70
  text "D" at 11375,867 h70
  text "DATUM:" at 6850,700 h45
  text "REVISION:" at 8350,700 h45
  text "MASZSTAB:" at 9180,700 h45
  text "DOKUMENTENSTATUS:" at 10250,700 h45
  text "HTBLVA" at 5550,600 h70
  text ".PRINT_DATE" at 6900,580 h70
  text "0.1" at 8400,580 h70
  text ".Print_Scale" at 9230,580 h70
  text "ENTWURF" at 10300,580 h70
  text "Abt. Elektronik" at 5550,500 h70
  text "Anichstrasse 26-28" at 5550,400 h70
  text "SACHNUMMER/DATEINAME:" at 6850,400 h45
  text "BLATT:" at 10250,400 h45
  text "BLAETTER:" at 10800,400 h45
  text "A-6020 Innsbruck" at 5550,300 h70
  text ".PCB_FILE_NAME_NO_PATH" at 6900,280 h70
  text "6" at 10850,280 h70
  text "1" at 1427,65 h70
  text "2" at 4287,65 h70
  text "3" at 7167,65 h70
  text "4" at 10037,65 h70
Drill Drawing:
  text ".LEGEND" at 7525,2150 h60
  text "BOHRPLAN" at 10300,880 h70
  text "6" at 10300,280 h70

## Dimensions
3500,2809.05 to 3540,2778.28 on Mechanical 4 (Printumriss)
6972.05,2659.06 to 3650,5100 on Mechanical 4 (Printumriss)
6975,4950.38 to 7000,5100 on Mechanical 4 (Printumriss)
6972.05,2659.06 to 7122.05,2809.05 on Mechanical 4 (Printumriss)
6972.05,2659.06 to 7122.05,2809.05 on Mechanical 4 (Printumriss)
7122.05,4989.59 to 6975,4950.38 on Mechanical 4 (Printumriss)
3650,4950 to 3500,5100 on Mechanical 3 (Bemassungen)
3650,4950 to 3500,5100 on Mechanical 3 (Bemassungen)
3500,5100 to 3500,2659.06 on Mechanical 3 (Bemassungen)
7122.05,5100 to 3500,5100 on Mechanical 3 (Bemassungen)

## Text inside footprints (layer, text, board x,y; h text height)
P1: Top Overlay "39" at 5830,2830 h50; Top Overlay "40" at 5830,2930 h50; Top Overlay "2" at 3750,2930 h50; Top Overlay "1" at 3750,2830 h50